# Altium PCB PCBINPUTPowerModulever1.PcbDoc
Units mm, origin at the board's own origin, x right, y up, seen from the top; angles counter-clockwise.
Board outline 117.5 x 62.5 mm, 2 copper layers (Top Layer, Bottom Layer), stack 1.671 mm thick; 51 components, 58 nets, 141 pads, 0 vias.
Unrouted connection lines stored in the file: 26.
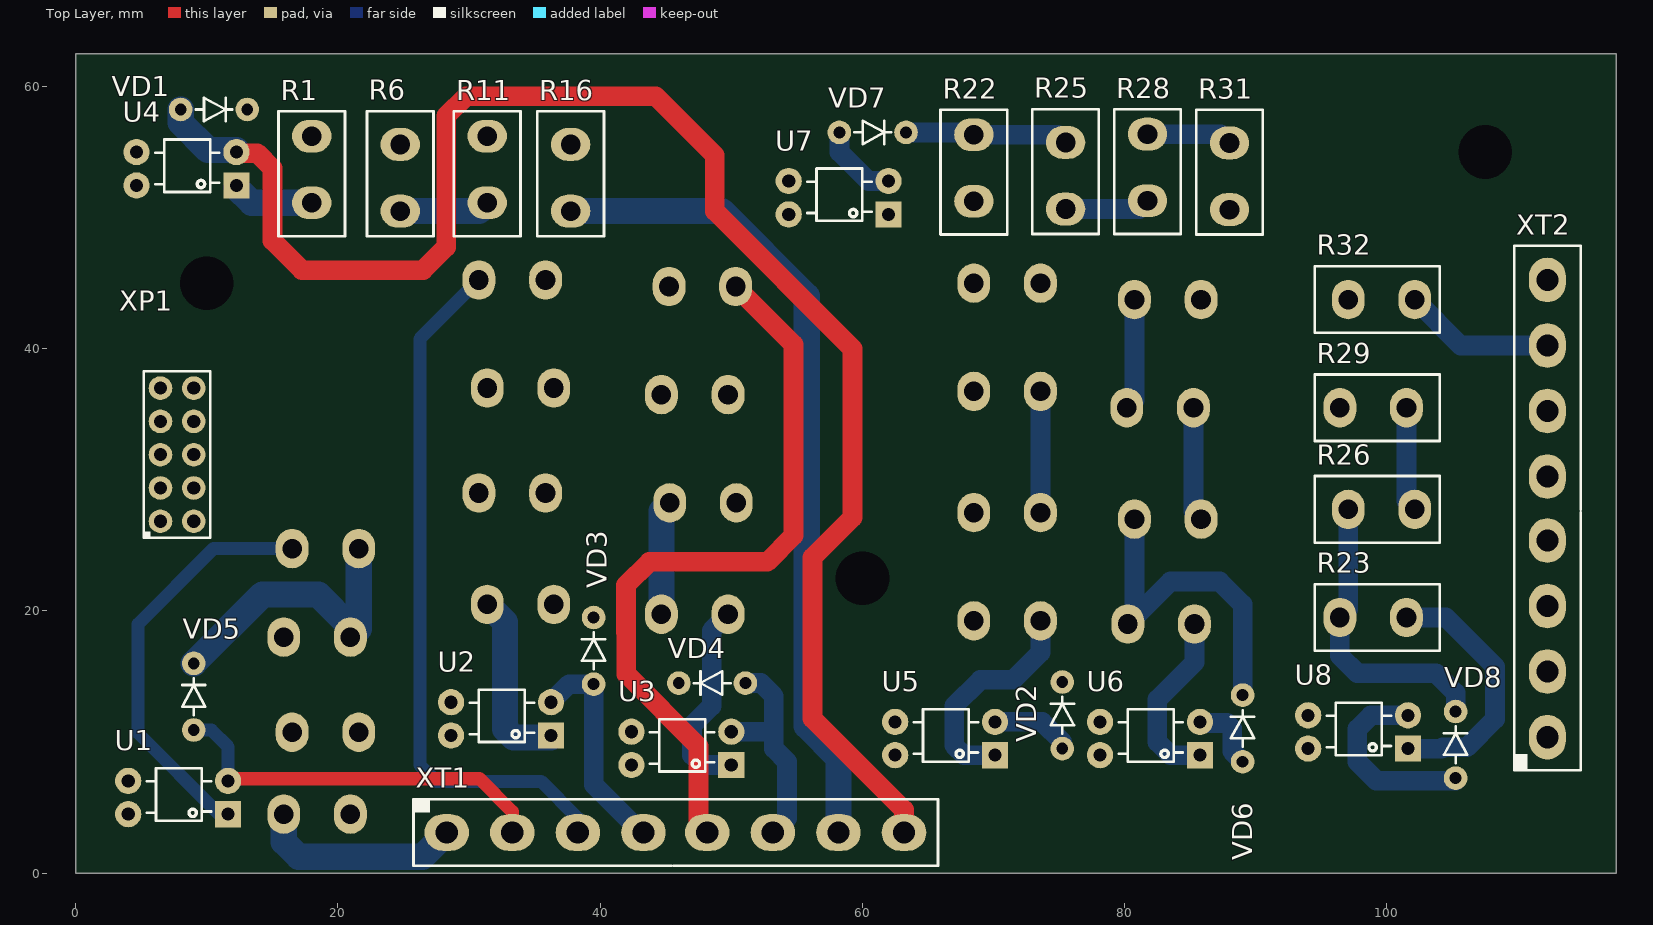
[diagram p0: Top Layer view]
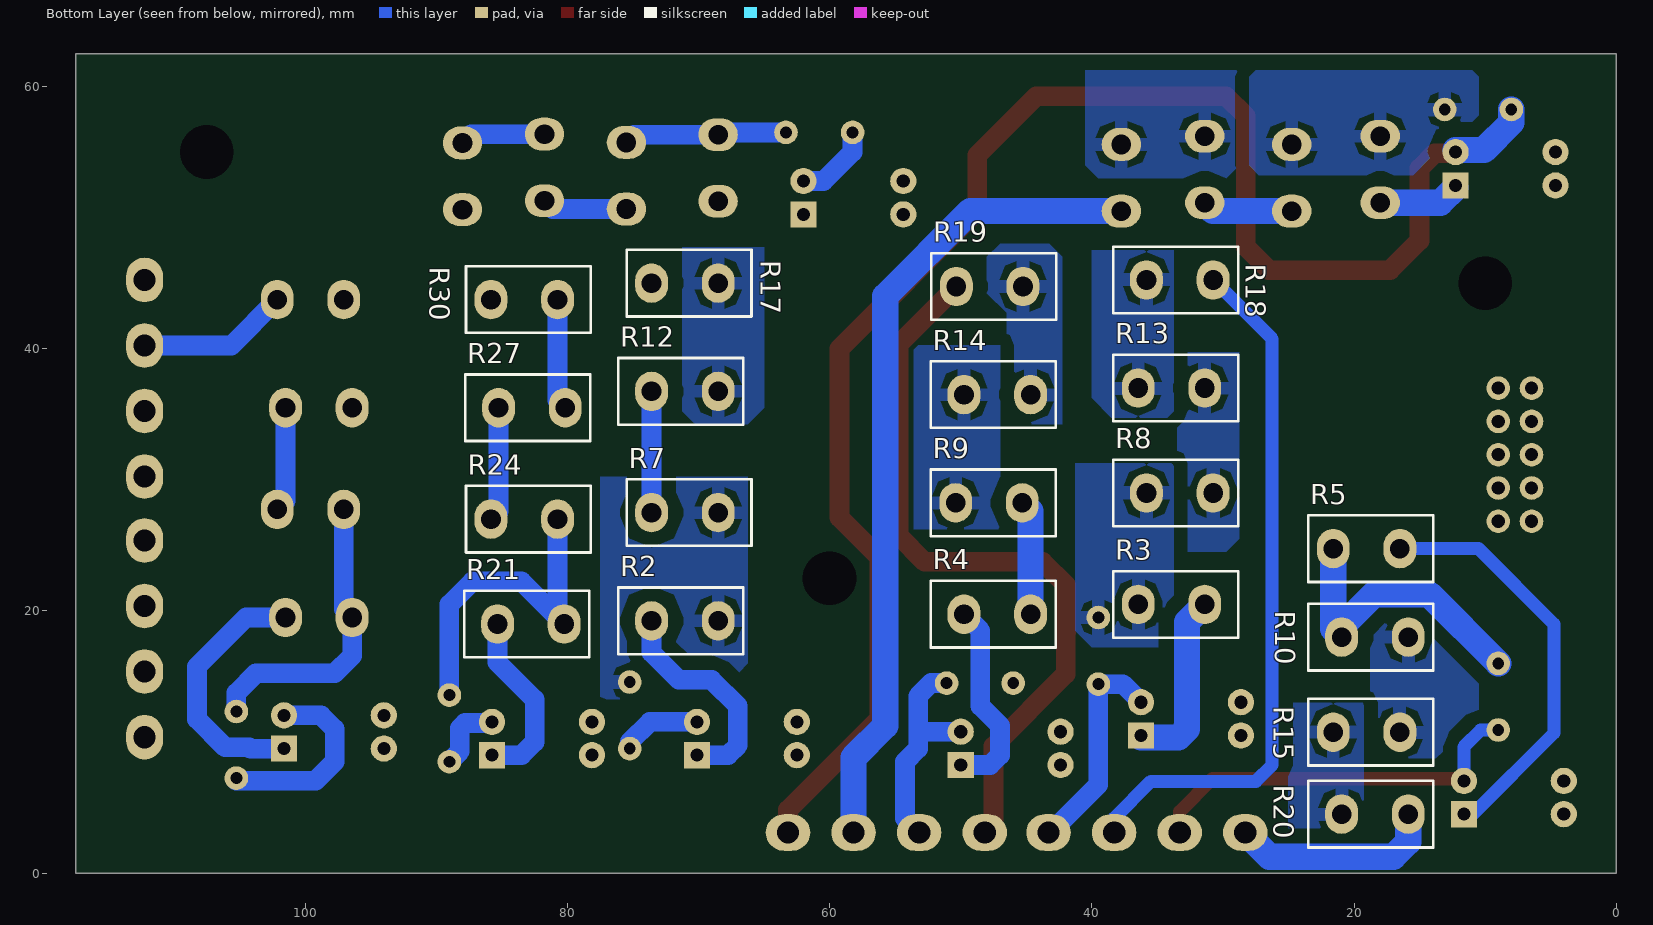
[diagram p1: Bottom Layer view, seen from below]

## Layer stack, top to bottom
Top Solder: solder mask 0.0102, Solder Resist, Dk 3.5
Top Layer: signal copper 0.0356
Dielectric 1: dielectric 1.6, FR-4, Dk 4.8
Bottom Layer: signal copper 0.0356
Bottom Solder: solder mask 0.0102, Solder Resist, Dk 3.5

## Board outline
0,0 117.5,0 117.5,62.5 0,62.5

## Design rules (kind name [scope] priority, off if disabled: settings)
Clearance [All] p1: gap=1 ignorepadtopadclearanceinfootprint=FALSE except(0.5: Arc-Via Arc-Text Track-Via Track-Text SMDPad-Via SMDPad-Text THPad-THPad THPad-Text Via-Text Fill-Text Poly-Text Region-Text Text-Text; 0.7: Arc-Arc Arc-Track Arc-SMDPad Arc-THPad Track-Track Track-SMDPad Track-THPad SMDPad-SMDPad SMDPad-THPad THPad-Via Via-Via)
PlaneClearance PlaneClearance_1 [InNetClass('Power')] p1: clearance=2
PlaneClearance [InNetClass('Input')] p2: clearance=0.5
PlaneConnect PlaneConnect_Power [InNetClass('Power')] p1: planeconnectstyle=Relief reliefexpansion=1.5 reliefentries=4 reliefconductorwidth=1.5 reliefairgap=0.5
PlaneConnect PlaneConnect_input [InNetClass('Input')] p2: planeconnectstyle=Relief reliefexpansion=0.5 reliefentries=4 reliefconductorwidth=0.5 reliefairgap=0.3
PolygonConnect PolygonConnect_1 [InNetClass('Power')] p1: connectstyle=Relief reliefconductorwidth=1 reliefentries=4 polygonreliefangle="90 Angle" airgapwidth=0.5
PolygonConnect [InNetClass('Input')] p2: connectstyle=Relief reliefconductorwidth=0.75 reliefentries=4 polygonreliefangle="90 Angle" airgapwidth=0.4
RoutingVias [All] p1: holewidth=0.8 width=1.6 viastyle="Through Hole" minholewidth=0.8 minwidth=1.6 maxholewidth=0.8 maxwidth=1.6
SolderMaskExpansion [All] p1: expansion=0.102
Width Input_circuit [InNetClass('Input')] p1: maxlimit=1 minlimit=0.3 preferedwidth=0.5
Width Power_circuit [InNetClass('Power')] p2: maxlimit=4 minlimit=0.6 preferedwidth=2
28 further rules are at their usual default settings.

## Classes and differential pairs
net class Power: NetR1_1 NetR1_2 NetR2_1 NetR2_2 NetR3_1 NetR3_2 NetR4_1 NetR4_2 NetR5_1 NetR5_2 NetR6_2 NetR7_2 NetR8_2 NetR9_2 NetR10_2 NetR11_2 NetR12_2 NetR13_2 NetR14_2 NetR15_2 NetR21_1 NetR21_2 NetR22_1 NetR22_2 NetR23_1 NetR23_2 NetR24_2 NetR25_2 NetR26_2 NetR27_2 NetR28_2 NetR29_2 SW1_1 SW1_2 SW2_1 SW2_2 SW3_1 SW3_2 SW4_1 SW4_2 SW5_1 SW5_2 SW6_1 SW6_2 SW7_1 SW7_2 SW8_1 SW8_2
net class Input: GND INPUT1 INPUT2 INPUT3 INPUT4 INPUT5 INPUT6 INPUT7 INPUT8 VCC

## Components (designator, comment, footprint, x,y, rotation, side; value= is the part's Value field where it differs from the comment)
R1 "CFR02WJ0151P5" MOF-2W-15x5 18,51.135 r90 top value=150
R2 "CFR02WJ0151P5" MOF-2W-15x5 73.58,19.25 r180 bottom value=150
R3 "CFR02WJ0151P5" MOF-2W-15x5 31.385,20.5 r0 bottom value=150
R4 "CFR02WJ0151P5" MOF-2W-15x5 49.75,19.75 r180 bottom value=150
R5 "CFR02WJ0151P5" MOF-2W-15x5 16.5,24.75 r0 bottom value=150
R6 "CFR02WJ0512P5" MOF-2W-15x5 24.75,55.58 r270 top value=5k1
R7 "CFR02WJ0512P5" MOF-2W-15x5 68.5,27.5 r0 bottom value=5k1
R8 "CFR02WJ0512P5" MOF-2W-15x5 35.83,29 r180 bottom value=5k1
R9 "CFR02WJ0512P5" MOF-2W-15x5 45.305,28.25 r0 bottom value=5k1
R10 "CFR02WJ0512P5" MOF-2W-15x5 20.945,18 r180 bottom value=5k1
R11 "CFR02WJ0512P5" MOF-2W-15x5 31.385,51.135 r90 top value=5k1
R12 "CFR02WJ0512P5" MOF-2W-15x5 73.58,36.75 r180 bottom value=5k1
R13 "CFR02WJ0512P5" MOF-2W-15x5 31.385,37 r0 bottom value=5k1
R14 "CFR02WJ0512P5" MOF-2W-15x5 49.75,36.5 r180 bottom value=5k1
R15 "CFR02WJ0512P5" MOF-2W-15x5 16.5,10.75 r0 bottom value=5k1
R16 "CFR02WJ0512P5" MOF-2W-15x5 37.75,55.58 r270 top value=5k1
R17 "CFR02WJ0512P5" MOF-2W-15x5 68.5,45 r0 bottom value=5k1
R18 "CFR02WJ0512P5" MOF-2W-15x5 35.83,45.25 r180 bottom value=5k1
R19 "CFR02WJ0512P5" MOF-2W-15x5 45.25,44.75 r0 bottom value=5k1
R20 "CFR02WJ0512P5" MOF-2W-15x5 20.945,4.5 r180 bottom value=5k1
R21 "CFR02WJ0151P5" MOF-2W-15x5 85.33,19 r180 bottom value=150
R22 "CFR02WJ0151P5" MOF-2W-15x5 68.5,51.25 r90 top value=150
R23 "CFR02WJ0151P5" MOF-2W-15x5 101.5,19.5 r180 top value=150
R24 "CFR02WJ0512P5" MOF-2W-15x5 80.75,27 r0 bottom value=5k1
R25 "CFR02WJ0512P5" MOF-2W-15x5 75.5,55.735 r270 top value=5k1
R26 "CFR02WJ0512P5" MOF-2W-15x5 97.055,27.75 r0 top value=5k1
R27 "CFR02WJ0512P5" MOF-2W-15x5 85.25,35.5 r180 bottom value=5k1
R28 "CFR02WJ0512P5" MOF-2W-15x5 81.75,51.29 r90 top value=5k1
R29 "CFR02WJ0512P5" MOF-2W-15x5 101.5,35.5 r180 top value=5k1
R30 "CFR02WJ0512P5" MOF-2W-15x5 80.75,43.75 r0 bottom value=5k1
R31 "CFR02WJ0512P5" MOF-2W-15x5 88,55.695 r270 top value=5k1
R32 "CFR02WJ0512P5" MOF-2W-15x5 97.055,43.75 r0 top value=5k1
U1 "PC817C" DIP-4M 11.62,4.5 r180 top
U2 "PC817C" DIP-4M 36.25,10.5 r180 top
U3 "PC817C" DIP-4M 50,8.25 r180 top
U4 "PC817C" DIP-4M 12.25,52.46 r180 top
U5 "PC817C" DIP-4M 70.12,9 r180 top
U6 "PC817C" DIP-4M 85.75,9 r180 top
U7 "PC817C" DIP-4M 62,50.25 r180 top
U8 "PC817C" DIP-4M 101.62,9.5 r180 top
VD1 "BZX55C3V3" DO-35 8,58.25 r0 top
VD2 "BZX55C3V3" DO-35 75.25,9.5 r90 top
VD3 "BZX55C3V3" DO-35 39.5,14.42 r90 top
VD4 "BZX55C3V3" DO-35 51.08,14.5 r180 top
VD5 "BZX55C3V3" DO-35 9,10.92 r90 top
VD6 "BZX55C3V3" DO-35 89,8.5 r90 top
VD7 "BZX55C3V3" DO-35 58.25,56.5 r0 top
VD8 "BZX55C3V3" DO-35 105.25,7.25 r90 top
XP1 "IDC BH-10" IDC-10-2 6.46,26.84 r90 top
XT1 "KLS2-EDGK-500-08P-4C" KLS2-EDR-500-8P 28.3,3.1 r0 top
XT2 "KLS2-EDGK-500-08P-4C" KLS2-EDR-500-8P 112.25,10.377 r90 top

## Footprints (in the part's own frame and the unit in brackets; to place one, negate y for a bottom-side part, rotate by r counter-clockwise, add the part's x,y. Pads: shape width x height; smd on the part's side, far side on the other; paste and mask are expansions set on the pad)
DIP-4M [mm]
  rect 2x2 hole 1: 1(0,0)
  round 2 hole 1: 2(0,-2.54) 3(7.62,-2.54) 4(7.62,0)
  silkscreen extent 1.3,-3.5 6.2,0.5, body extent -0.19,-4.04 7.81,1.5, height 4.31
DO-35 [mm]
  round 1.8 hole 0.9: 1(0,0) 2(5.08,0)
  silkscreen extent 1.14,-0.89 3.94,0.89, body extent -0.28,-0.9 5.35,0.9, height 1.82
IDC-10-2 [mm]
  round 1.8 hole 1: 1(0,0) 2(2.54,0) 3(5.08,0) 4(7.62,0) 5(10.16,0) 6(10.16,-2.54) 7(7.62,-2.54) 8(5.08,-2.54) 9(2.54,-2.54) 10(0,-2.54)
  silkscreen extent -1.27,-3.81 11.43,1.27, body extent -5.13,-6.22 15.27,3.13, height 10.25
KLS2-EDR-500-8P [mm]
  oval 3.4x2.8 hole 1.7: 1(0,0) 2(5,0) 3(10,0) 4(15,0) 5(19.873,0) 6(24.873,0) 7(29.873,0) 8(34.873,0)
  silkscreen extent -2.54,-2.54 37.46,2.54, body extent -2.41,-20.69 37.46,1.65, height 16.34
MOF-2W-15x5 [mm]
  oval 2.5x3 hole 1.5: 1(0,0) 2(5.08,0)
  silkscreen extent -2.54,-2.54 6.98,2.54, body extent -2.6,-2.6 5.4,2.6, height 23.6

## Part data
R1 R2 R3 R4 R5 R6 R7 R8 R9 R10 R11 R12 R13 R14 R15 R16 R17 R18 R19 R20 R21 R22 R23 R24 R25 R26 R27 R28 R29 R30 R31 R32: library part Resistor, Manufacturer="Royal Ohm", Package=AXELPackage, Power=2W, Price=0.05, Quntity=24
  R1 R2 R3 R4 R5 R21 R22 R23: Part Number=CFR02WJ0151P5, ShoppingPlace=http://belchip.by/product/?selected_product=08041
  R6 R7 R8 R9 R10 R11 R12 R13 R14 R15 R16 R17 R18 R19 R20 R24 R25 R26 R27 R28 R29 R30 R31 R32: Part Number=CFR02WJ0512P5, ShoppingPlace=http://belchip.by/product/?selected_product=05907
U1 U2 U3 U4 U5 U6 U7 U8: library part PC817, Manufacturer=SHARP, Package=DIP-4, Part Number=PC817C, Price=0.15, Quantity=8, ShoppingPlace=http://belchip.by/product/?selected_product=29779
VD1 VD2 VD3 VD4 VD5 VD6 VD7 VD8: library part Stabilitron, Manufacturer="DC Components", Package=DO-35, Part Number=BZX55C3V3, Price=0.025, Quantity=16, ShoppingPlace=http://belchip.by/product/?selected_product=01814
XP1: library part "Разъем IDC BH-10", Manufacturer=RUICHI, Part Number="IDC BH-10", Price=0.22, Quantity=1, ShoppingPlace=http://belchip.by/product/?selected_product=01919
XT1 XT2: Manufacturer=KLS, Part Number=KLS2-EDGK-500-08P-4C, Price=0.55, Quantity=2, ShoppingPlace=http://belchip.by/product/?selected_product=19113

## Free pads (board coordinates)
  round 0 hole 4.1: 0(10,45) 0(60,22.5) 0(107.5,55)

## Nets (pads, with @x,y where several pads share a name; then routed paths per layer and width w, separated by ;. In a path a pad name is that pad's centre, name@x,y a point inside that pad or via, vN(x,y) a via of type N, cw(c..) or ccw(c..) an arc to the next point about the centre after c; other vN are vias at no path point)
GND: U1.3 U2.3 U3.3 U4.3 U5.3 U6.3 U7.3 U8.3 XP1.10
INPUT1: U1.4 XP1.1
INPUT2: U2.4 XP1.2
INPUT3: U3.4 XP1.3
INPUT4: U4.4 XP1.4
INPUT5: U5.4 XP1.5
INPUT6: U6.4 XP1.6
INPUT7: U7.4 XP1.7
INPUT8: U8.4 XP1.8
NetR1_1: R1.1 U4.1 | length 6.2
  Bottom Layer w2: U4.1@12.25,52.3 13.415,51.135 R1.1
NetR1_2: R1.2 R6.1 VD1.2
NetR2_1: R2.1 U5.1 | length 17.1
  Bottom Layer w1.5: U5.1 67.75,9 67,9.75 67,12.75 69,14.75 71.5,14.75 73.58,16.83 R2.1
NetR2_2: R2.2 R7.1 VD2.2
NetR3_1: R3.1 U2.1 | length 13.8
  Bottom Layer w2: R3.1 32.75,19.135 32.75,11 33.41,10.34 U2.1@36.25,10.34
NetR3_2: R3.2 R8.1 VD3.2
NetR4_1: R4.1 U3.1 | length 15.2
  Bottom Layer w1.5: R4.1 48.5,18.5 48.5,12.755 47,11.255 47,9 47.75,8.25 U3.1
NetR4_2: R4.2 R9.1 VD4.2 | length 8.8
  Bottom Layer w2: R4.2 44.67,27.615 R9.1
NetR5_1: R5.1 U1.1 | length 31.9
  Bottom Layer w1: U1.1 10.94,4.5 4.75,10.69 4.75,19 10.5,24.75 R5.1
NetR5_2: R5.2 R10.1 VD5.2 | length 23
  Bottom Layer w2: VD5.2 14.25,21.25 18.5,21.25 20.945,18.805 R10.1 21.58,18.635 R5.2
NetR6_2: R6.2 R11.1 | length 6.9
  Bottom Layer w2: R6.2 30.75,50.5 R11.1
NetR7_2: R7.2 R12.1 | length 9.3
  Bottom Layer w1.5: R7.2 R12.1
NetR8_2: R8.2 R13.1
NetR9_2: R9.2 R14.1
NetR10_2: R10.2 R15.1
NetR11_2: R11.2 R16.1
NetR12_2: R12.2 R17.1
NetR13_2: R13.2 R18.1
NetR14_2: R14.2 R19.1
NetR15_2: R15.2 R20.1
NetR21_1: R21.1 U6.1 | length 13.8
  Bottom Layer w1.5: R21.1 85.33,16.08 82.5,13.25 82.5,10 83.5,9 U6.1
NetR21_2: R21.2 R24.1 VD6.2 | length 25.2
  Bottom Layer w1.5: R21.2 R21.2@80.75,19.5 ; R24.1 R21.2@80.75,19.5 ; VD6.2 89,20.5 87.25,22.25 83.5,22.25 R21.2@80.75,19.5
NetR22_1: R22.1 U7.1
NetR22_2: R22.2 R25.1 VD7.2 | length 12.5
  Bottom Layer w1.5: VD7.2 68.33,56.5 R22.2 74.905,56.33 R25.1
NetR23_1: R23.1 U8.1 | length 19.9
  Bottom Layer w1.5: R23.1 104.5,19.5 108.25,15.75 108.25,11.75 106.1,9.6 104.277,9.6 104.177,9.5 U8.1
NetR23_2: R23.2 R26.1 VD8.2 | length 22.9
  Bottom Layer w1.5: R26.1 97.055,20.135 R23.2 96.42,16.58 97.75,15.25 103.75,15.25 105.25,13.75 VD8.2
NetR24_2: R24.2 R27.1 | length 8.7
  Bottom Layer w1.5: R27.1 85.25,27.58 R24.2
NetR25_2: R25.2 R28.1 | length 6.5
  Bottom Layer w1.5: R25.2 81.115,50.655 R28.1
NetR26_2: R26.2 R29.1 | length 8
  Bottom Layer w1.5: R29.1 101.5,28.385 R26.2
NetR27_2: R27.2 R30.1 | length 8.5
  Bottom Layer w1.5: R27.2 80.75,36.08 R30.1
NetR28_2: R28.2 R31.1 | length 6.5
  Bottom Layer w1.5: R28.2 87.325,56.37 R31.1
NetR29_2: R29.2 R32.1
SW1_1: R20.2 XT1.1 | length 15.8
  Bottom Layer w2: R20.2 15.865,2.385 17,1.25 26.45,1.25 XT1.1
SW1_2: U1.2 VD5.1 XT1.2 | length 30.2
  Top Layer w1: U1.2 11.62,7.2 30.8,7.2 33.3,4.7 XT1.2
  Bottom Layer w1: VD5.1 10.33,10.92 11.62,9.63 U1.2
SW2_1: R18.2 XT1.3 | length 53.7
  Bottom Layer w1: R18.2 26.25,40.75 26.25,8.25 27.5,7 35.5,7 38.3,4.2 XT1.3
SW2_2: U2.2 VD3.1 XT1.4 | length 16.8
  Bottom Layer w1.5: U2.2 37.63,14.42 VD3.1 39.5,6.75 43.15,3.1 XT1.4
SW3_1: R19.2 XT1.5 | length 56.6
  Top Layer w1.5: XT1.5 47.5,3.773 47.5,9.677 42,15.177 42,18.322 41.97,18.352 41.97,21.97 43.75,23.75 52.75,23.75 54.75,25.75 54.75,40.33 R19.2
SW3_2: U3.2 VD4.1 XT1.6 | length 17.1
  Bottom Layer w1.5: U3.2 53.21,10.79 53.25,10.75 ; VD4.1 52.25,14.5 53.25,13.5 53.25,10.75 ; XT1.6 54.25,4.177 54.25,8.5 53.25,9.5 53.25,10.75
SW4_1: R16.2 XT1.7 | length 62.6
  Bottom Layer w2: R16.2 49.25,50.5 55.75,44 55.75,11.25 58.173,8.827 XT1.7
SW4_2: U4.2 VD1.1 XT1.8 | length 122.9
  Top Layer w1.5: U4.2 12.34,54.91 13.851,54.91 15,53.761 15,48.25 17.25,46 26.5,46 28.25,47.75 28.25,57.75 29.75,59.25 44.25,59.25 48.75,54.75 48.75,50.5 59.25,40 59.25,27.124 56.2,24.074 56.2,11.8 63.173,4.827 XT1.8
  Bottom Layer w2: VD1.1 8,57.25 10.09,55.16 U4.2@12.25,55.16
SW5_1: R17.2 XT2.1
SW5_2: U5.2 VD2.1 XT2.2 | length 6.3
  Bottom Layer w1.5: U5.2 73.71,11.54 75.25,10 VD2.1
SW6_1: R30.2 XT2.3
SW6_2: U6.2 VD6.1 XT2.4 | length 5.5
  Bottom Layer w1.5: U6.2 85.84,11.45 87.807,11.45 88.2,11.057 88.2,9.3 VD6.1
SW7_1: R31.2 XT2.5
SW7_2: U7.2 VD7.1 XT2.6 | length 6.2
  Bottom Layer w1.5: VD7.1 58.25,55 60.46,52.79 U7.2
SW8_1: R32.2 XT2.7 | length 11.6
  Bottom Layer w1.5: R32.2 105.635,40.25 XT2.7
SW8_2: U8.2 VD8.1 XT2.8 | length 15.1
  Bottom Layer w1.5: U8.2 98.79,12.04 97.75,11 97.75,8.5 99.2,7.05 105.25,7.05 VD8.1
VCC: XP1.9

## Polygon pours and split planes (outlines as drawn)
NetR12_2 on Bottom Layer "Top Overlay-No Net" (solid, remove dead copper, pour order 20): 65,35.5 66.25,34.25 70.25,34.25 71.25,35.25 71.25,47.75 65,47.75
NetR2_2 on Bottom Layer "Top Overlay-No Net" (solid, remove dead copper, pour order 18): 66.25,30.25 66.25,16 69,13.25 77.5,13.25 77.5,30.25
NetR1_2 on Bottom Layer "Top Overlay-No Net" (solid, remove dead copper, pour order 0): 10.5,60.75 11,61.25 27.5,61.25 28,60.75 28,54 27.25,53.25 15.5,53.25 14,54.75 14,56.25 13.25,57 10.5,57
NetR14_2 on Bottom Layer "Top Overlay-No Net" (solid, remove dead copper, pour order 16): 42.25,34.25 46,34.25 46.5,34.75 46.5,42.75 48,44.25 48,47 47,48 43.25,48 42.25,47
NetR9_2 on Bottom Layer "Top Overlay-No Net" (solid, remove dead copper, pour order 14): 47,26.25 53.75,26.25 54.25,26.75 54.25,39.25 53.25,40.25 47,40.25
NetR8_2 on Bottom Layer "Top Overlay-No Net" (solid, remove dead copper, pour order 12): 28.75,39.75 28.75,25.5 29.75,24.5 33,24.5 33.5,25 33.5,39.75
NetR3_2 on Bottom Layer "Top Overlay-No Net" (solid, remove dead copper, pour order 10): 33.75,31.25 33.75,18 34.5,17.25 40,17.25 41.25,18.5 41.25,31.25
NetR13_2 on Bottom Layer "Top Overlay-No Net" (solid, remove dead copper, pour order 8): 40,47.5 40,36.25 38.5,34.75 34.25,34.75 33.75,35.25 33.75,47.5
NetR10_2 on Bottom Layer "Top Overlay-No Net" (solid, remove dead copper, pour order 6): 18.75,8.75 18.75,18.75 17.5,20 14.75,20 10.5,15.75 10.5,12 13.75,8.75
NetR15_2 on Bottom Layer "Top Overlay-No Net" (solid, remove dead copper, pour order 4): 19.25,13 19.25,5 18.5,4.25 18.5,2.5 19.5,1.5 23.25,1.5 25,3.25 25,13
NetR11_2 on Bottom Layer "Top Overlay-No Net" (solid, remove dead copper, pour order 2): 28.75,61.25 28.75,54 29.75,53 39.5,53 40.5,54 40.5,61.25

## Silkscreen, mask and mechanical layers (free items; w line width, h text height)
Board:
  the board outline again, w0.254